# EAGLE board LED Panel v10 (EAGLE 5.03)
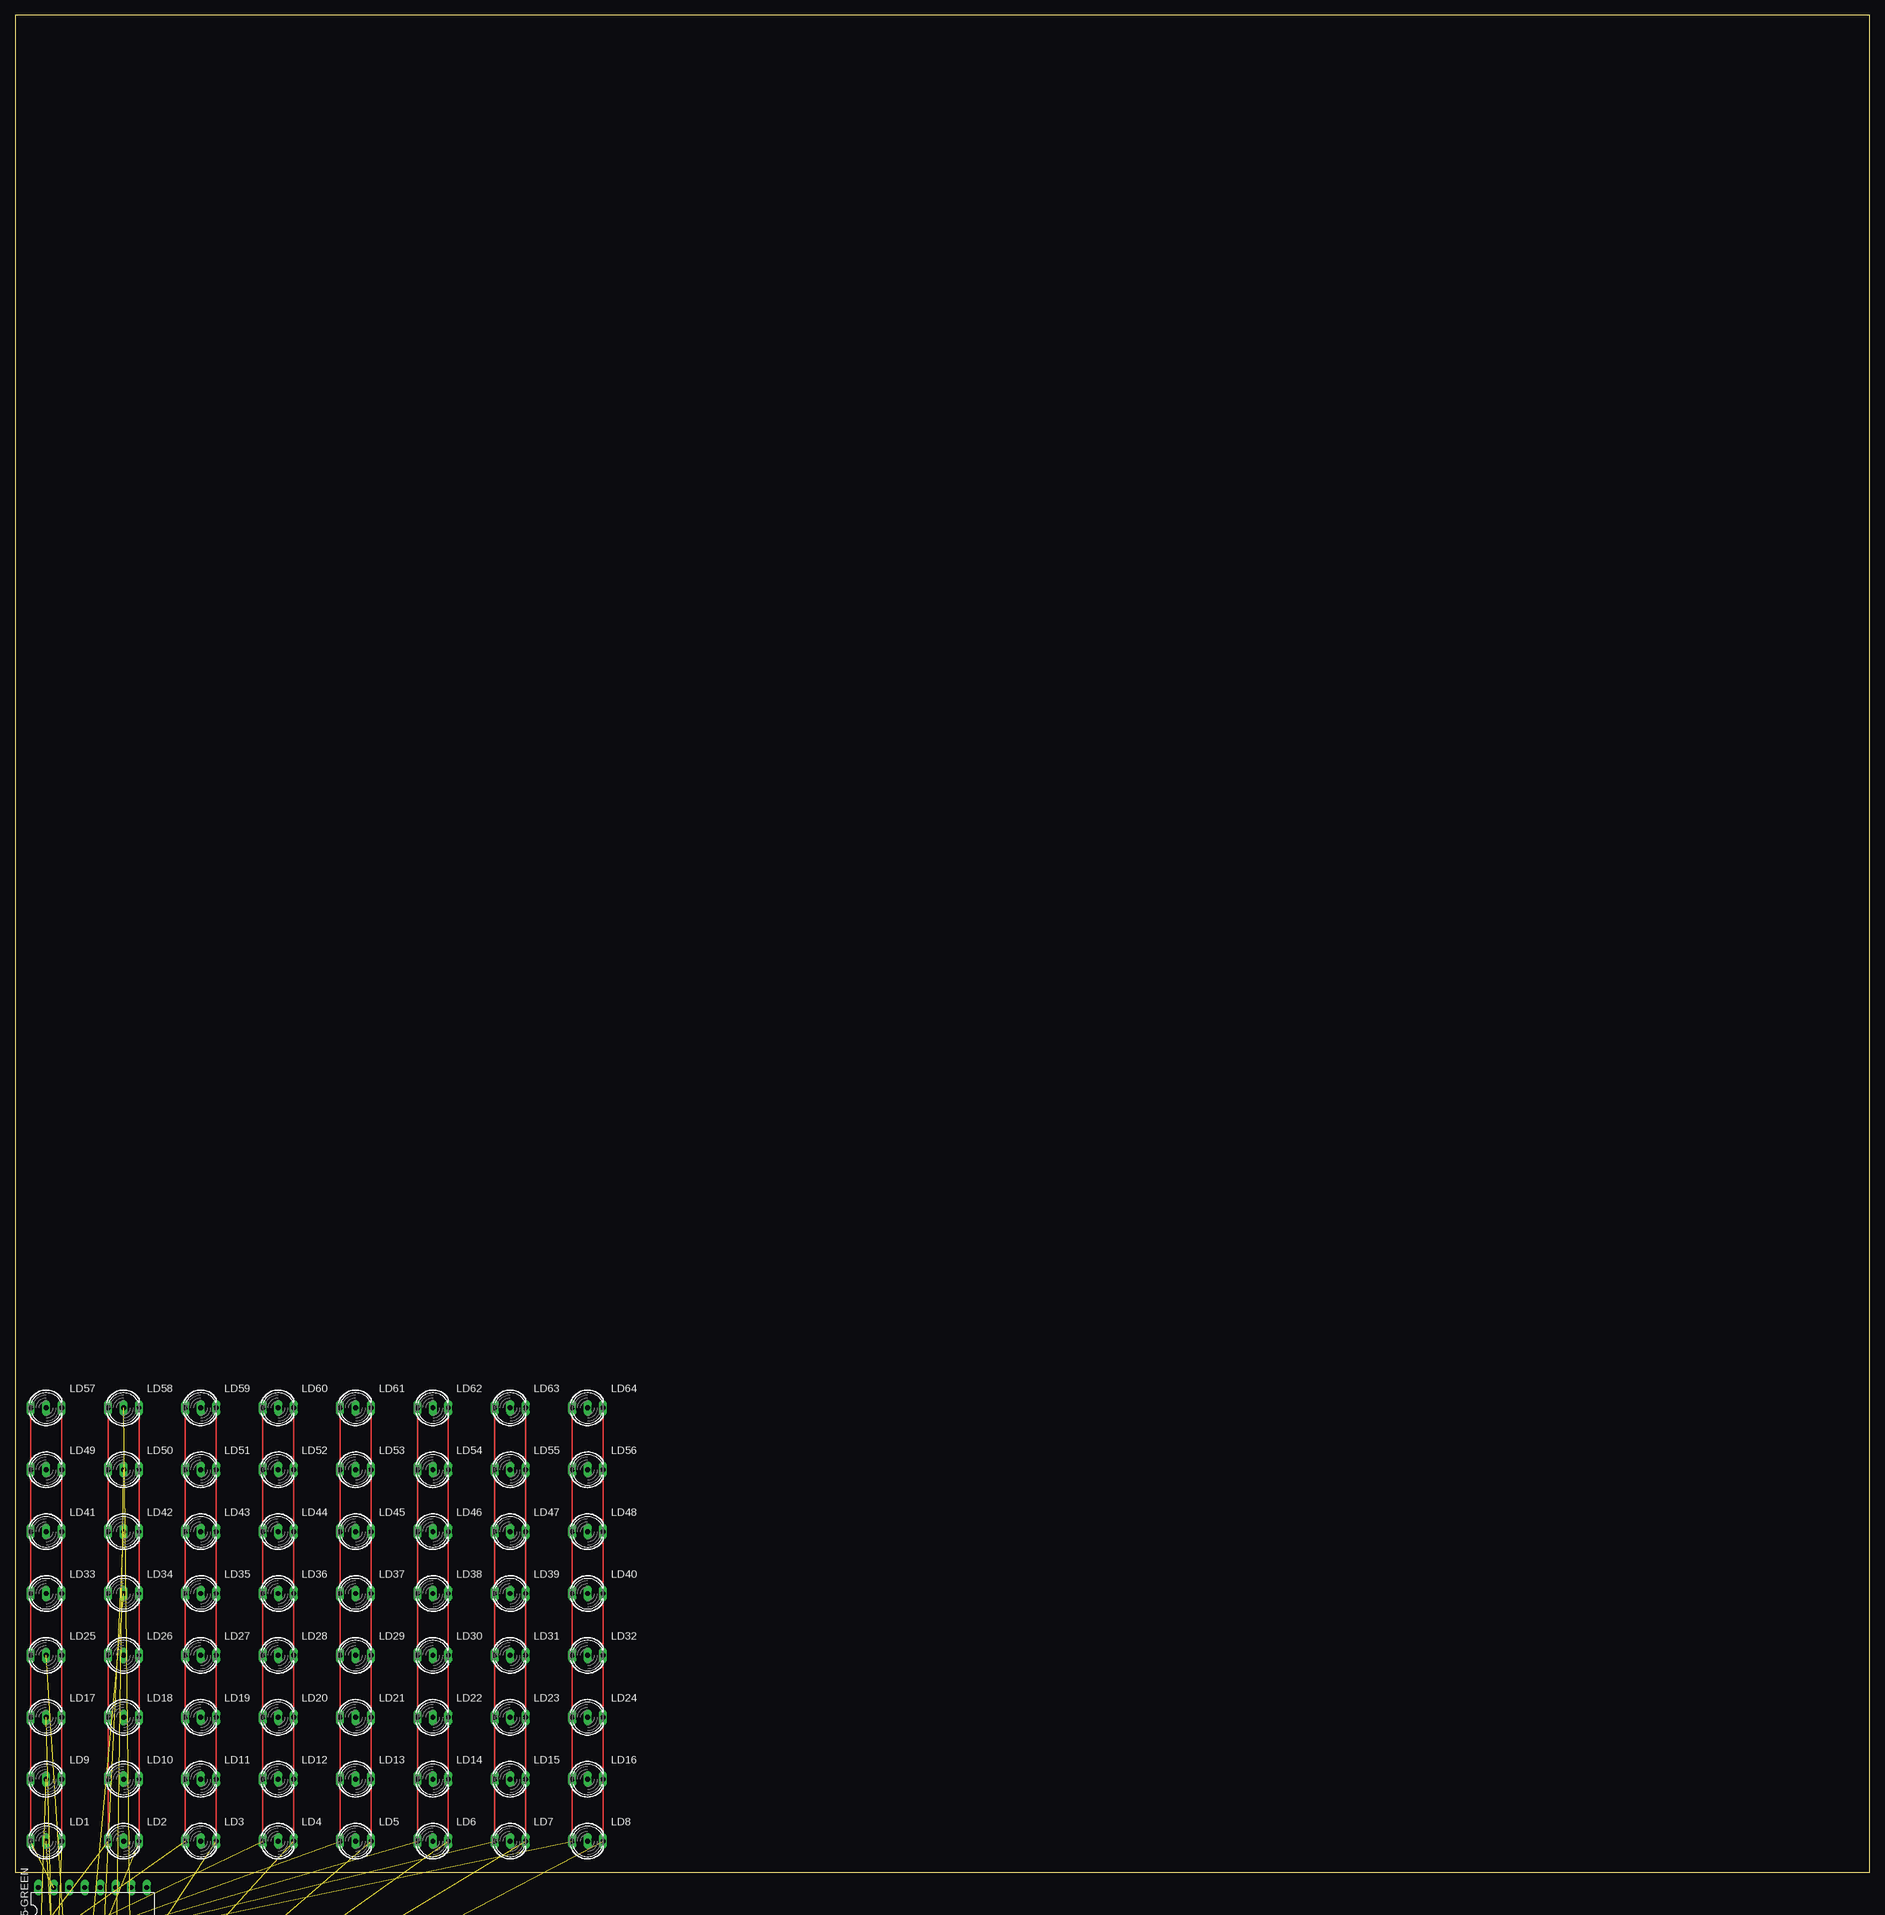
[diagram p0: board, top side]
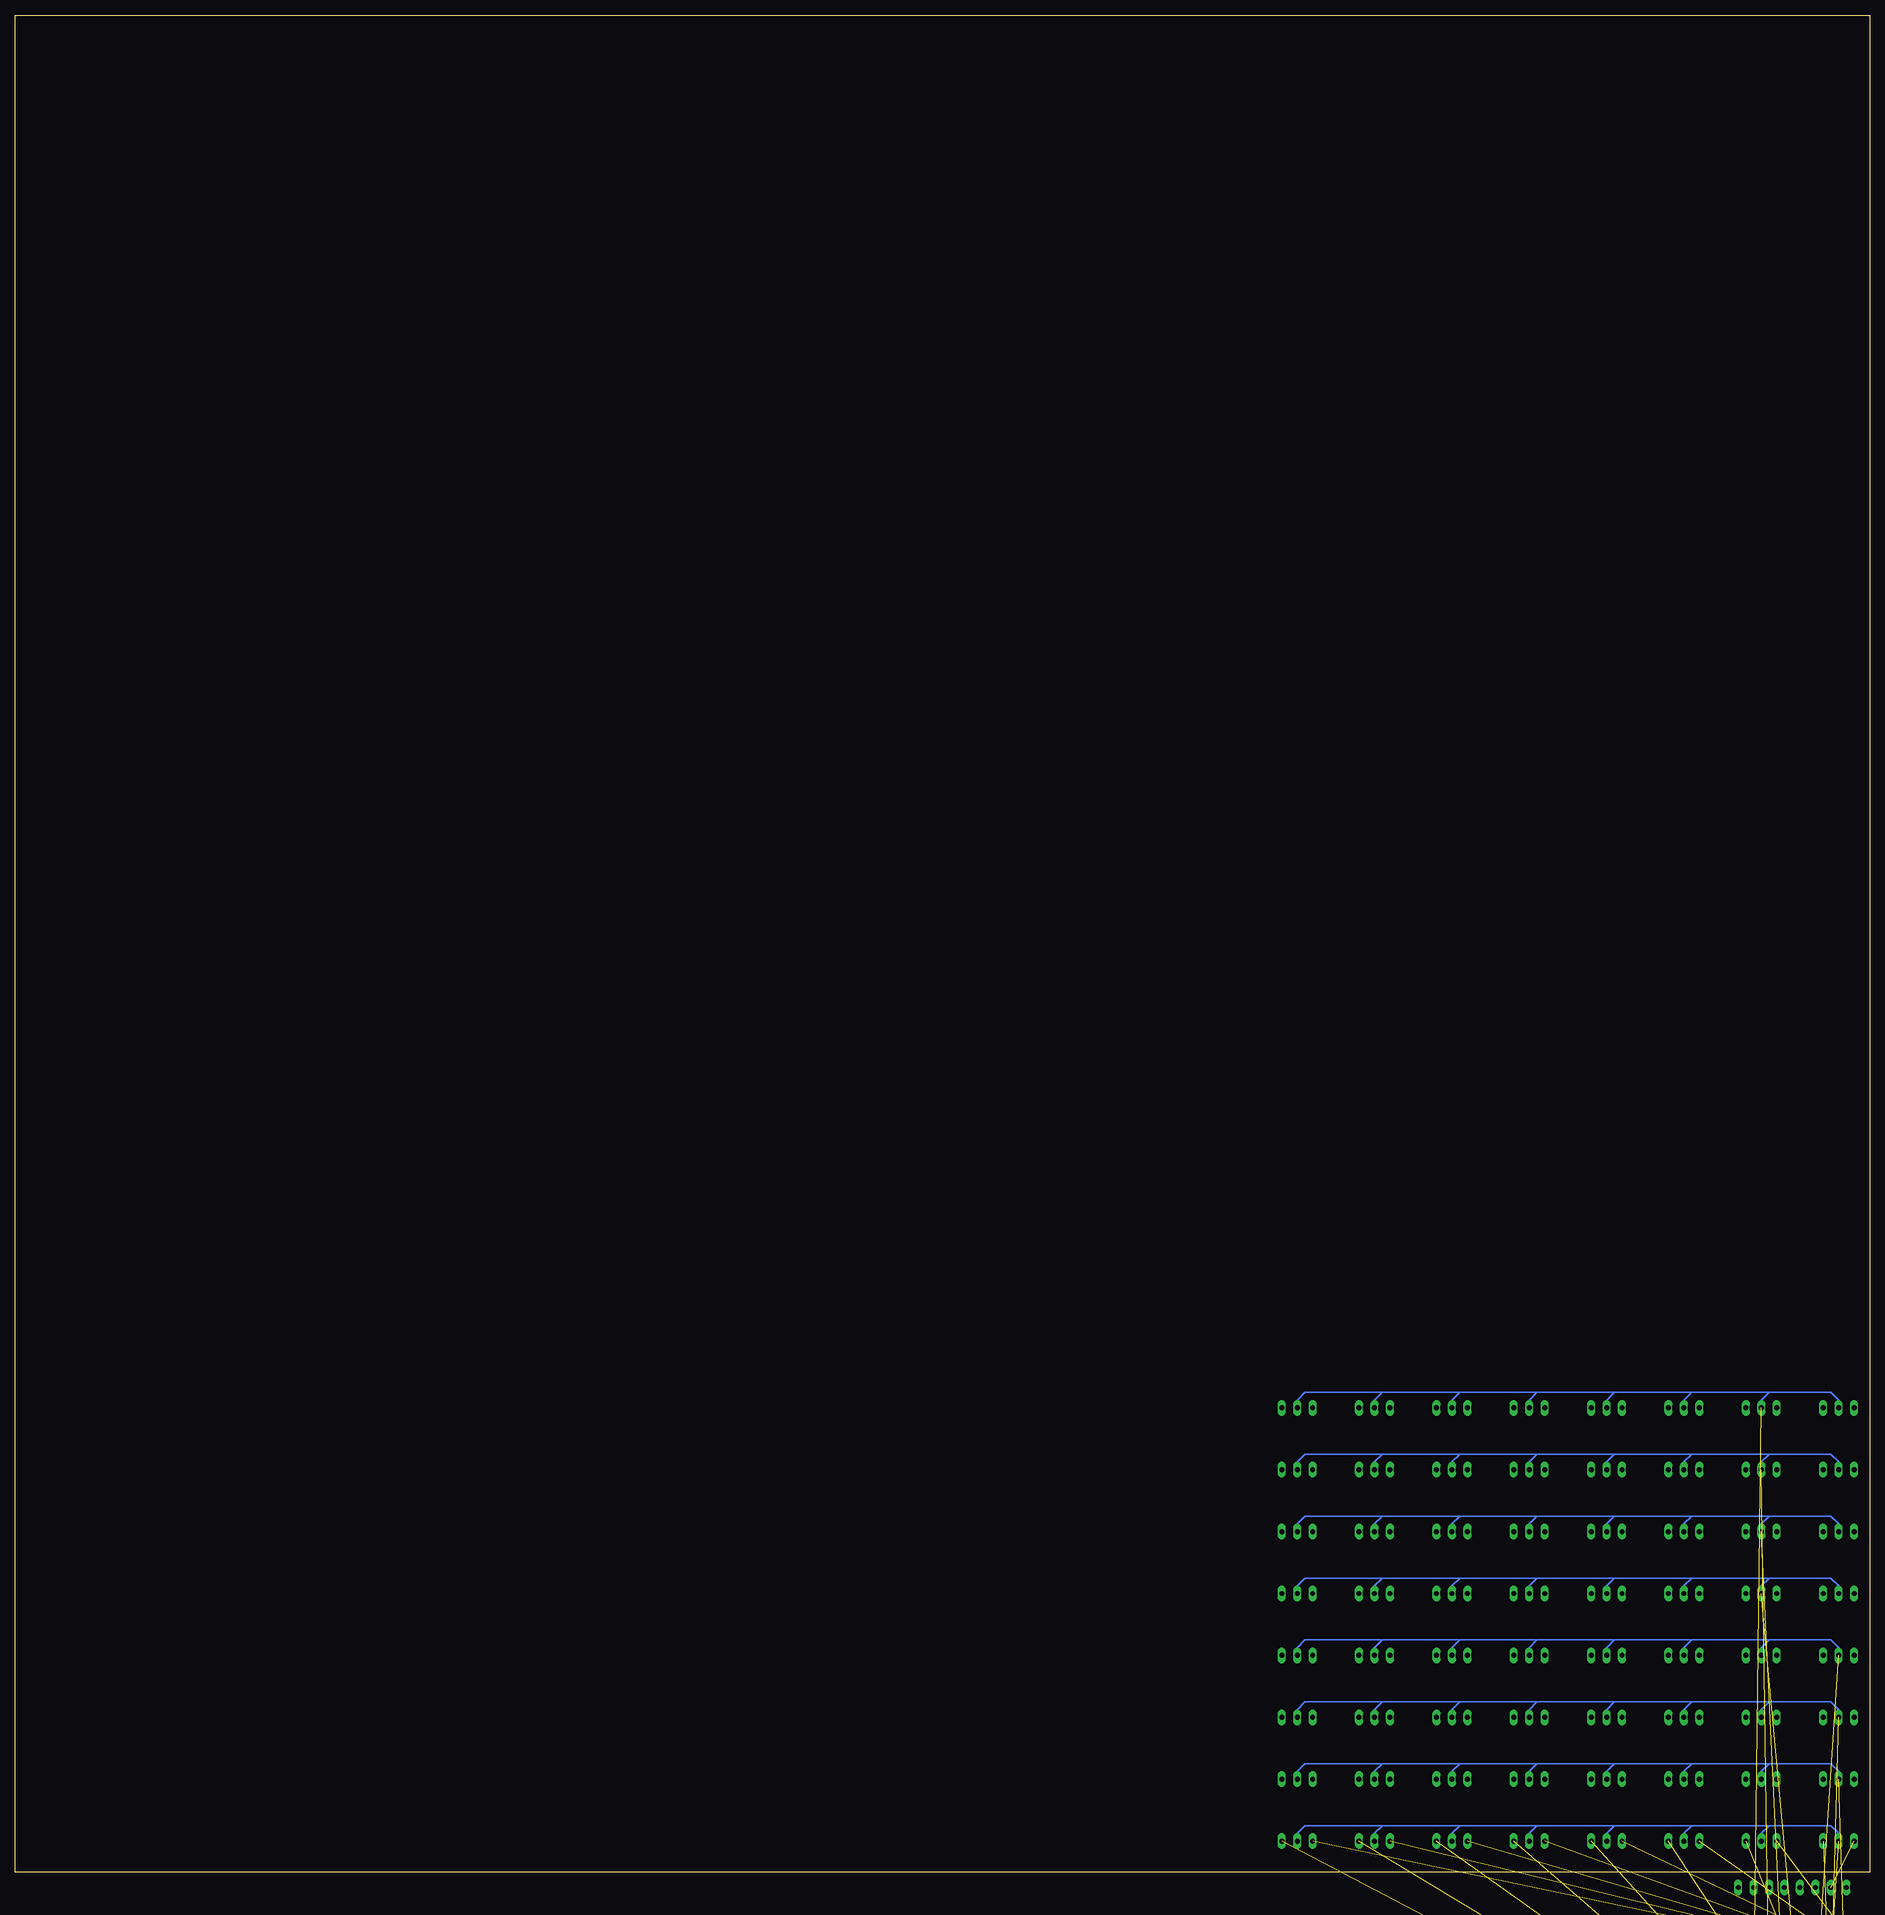
[diagram p1: board, bottom side, seen from below]

Size 304.47 x 304.79 mm. Coordinates in mm from the lower left corner, seen from the top.
Outline: 0,0 304.47,0 304.47,304.79 0,304.79 0,0
Copper layers (1*16): Top 0.035mm / dielectric 1.5mm / Bottom 0.035mm
Design rules "default": minimum track width 10mil, minimum drill 24mil, track to track 8mil, track to pad 8mil, pad to pad 8mil, via to via 8mil, smd to smd 8mil, copper to edge 40mil, drill to drill 8mil, minimum pad ring 10mil, minimum via ring 8mil, stop-mask expansion 4mil, vias tented up to drill 0mil, thermal gap 10mil

## Footprints (pad centres in the part's own frame; a part is rotated, then mirrored left to right if it is on the bottom)
DIL16 = drill 0.813 long: 1 -8.89,-3.81; 2 -6.35,-3.81; 3 -3.81,-3.81; 4 -1.27,-3.81; 5 1.27,-3.81; 6 3.81,-3.81; 7 6.35,-3.81; 8 8.89,-3.81; 9 8.89,3.81; 10 6.35,3.81; 11 3.81,3.81; 12 1.27,3.81; 13 -1.27,3.81; 14 -3.81,3.81; 15 -6.35,3.81; 16 -8.89,3.81
DUOLED-C-5MM = drill 0.813 long: AR 2.54,0; AX -2.54,0; C 0,0

## Placement (x,y rotation side)
595-CATH  [DIL16]  12.7,-19.05 0 top  (outside the outline)
595-GREEN  [DIL16]  12.7,-6.35 0 top
595-RED  [DIL16]  12.7,-31.75 0 top  (outside the outline)
LD1  [DUOLED-C-5MM]  5.08,5.08 0 top
LD2  [DUOLED-C-5MM]  17.78,5.08 0 top
LD3  [DUOLED-C-5MM]  30.48,5.08 0 top
LD4  [DUOLED-C-5MM]  43.18,5.08 0 top
LD5  [DUOLED-C-5MM]  55.88,5.08 0 top
LD6  [DUOLED-C-5MM]  68.58,5.08 0 top
LD7  [DUOLED-C-5MM]  81.28,5.08 0 top
LD8  [DUOLED-C-5MM]  93.98,5.08 0 top
LD9  [DUOLED-C-5MM]  5.08,15.24 0 top
LD10  [DUOLED-C-5MM]  17.78,15.24 0 top
LD11  [DUOLED-C-5MM]  30.48,15.24 0 top
LD12  [DUOLED-C-5MM]  43.18,15.24 0 top
LD13  [DUOLED-C-5MM]  55.88,15.24 0 top
LD14  [DUOLED-C-5MM]  68.58,15.24 0 top
LD15  [DUOLED-C-5MM]  81.28,15.24 0 top
LD16  [DUOLED-C-5MM]  93.98,15.24 0 top
LD17  [DUOLED-C-5MM]  5.08,25.4 0 top
LD18  [DUOLED-C-5MM]  17.78,25.4 0 top
LD19  [DUOLED-C-5MM]  30.48,25.4 0 top
LD20  [DUOLED-C-5MM]  43.18,25.4 0 top
LD21  [DUOLED-C-5MM]  55.88,25.4 0 top
LD22  [DUOLED-C-5MM]  68.58,25.4 0 top
LD23  [DUOLED-C-5MM]  81.28,25.4 0 top
LD24  [DUOLED-C-5MM]  93.98,25.4 0 top
LD25  [DUOLED-C-5MM]  5.08,35.56 0 top
LD26  [DUOLED-C-5MM]  17.78,35.56 0 top
LD27  [DUOLED-C-5MM]  30.48,35.56 0 top
LD28  [DUOLED-C-5MM]  43.18,35.56 0 top
LD29  [DUOLED-C-5MM]  55.88,35.56 0 top
LD30  [DUOLED-C-5MM]  68.58,35.56 0 top
LD31  [DUOLED-C-5MM]  81.28,35.56 0 top
LD32  [DUOLED-C-5MM]  93.98,35.56 0 top
LD33  [DUOLED-C-5MM]  5.08,45.72 0 top
LD34  [DUOLED-C-5MM]  17.78,45.72 0 top
LD35  [DUOLED-C-5MM]  30.48,45.72 0 top
LD36  [DUOLED-C-5MM]  43.18,45.72 0 top
LD37  [DUOLED-C-5MM]  55.88,45.72 0 top
LD38  [DUOLED-C-5MM]  68.58,45.72 0 top
LD39  [DUOLED-C-5MM]  81.28,45.72 0 top
LD40  [DUOLED-C-5MM]  93.98,45.72 0 top
LD41  [DUOLED-C-5MM]  5.08,55.88 0 top
LD42  [DUOLED-C-5MM]  17.78,55.88 0 top
LD43  [DUOLED-C-5MM]  30.48,55.88 0 top
LD44  [DUOLED-C-5MM]  43.18,55.88 0 top
LD45  [DUOLED-C-5MM]  55.88,55.88 0 top
LD46  [DUOLED-C-5MM]  68.58,55.88 0 top
LD47  [DUOLED-C-5MM]  81.28,55.88 0 top
LD48  [DUOLED-C-5MM]  93.98,55.88 0 top
LD49  [DUOLED-C-5MM]  5.08,66.04 0 top
LD50  [DUOLED-C-5MM]  17.78,66.04 0 top
LD51  [DUOLED-C-5MM]  30.48,66.04 0 top
LD52  [DUOLED-C-5MM]  43.18,66.04 0 top
LD53  [DUOLED-C-5MM]  55.88,66.04 0 top
LD54  [DUOLED-C-5MM]  68.58,66.04 0 top
LD55  [DUOLED-C-5MM]  81.28,66.04 0 top
LD56  [DUOLED-C-5MM]  93.98,66.04 0 top
LD57  [DUOLED-C-5MM]  5.08,76.2 0 top
LD58  [DUOLED-C-5MM]  17.78,76.2 0 top
LD59  [DUOLED-C-5MM]  30.48,76.2 0 top
LD60  [DUOLED-C-5MM]  43.18,76.2 0 top
LD61  [DUOLED-C-5MM]  55.88,76.2 0 top
LD62  [DUOLED-C-5MM]  68.58,76.2 0 top
LD63  [DUOLED-C-5MM]  81.28,76.2 0 top
LD64  [DUOLED-C-5MM]  93.98,76.2 0 top

## Library data of the parts
595-CATH 595-GREEN 595-RED = ic-package
LD1-LD64 = led

## Nets
CATH-0: 595-CATH.15 LD1.C LD2.C LD3.C LD4.C LD5.C LD6.C LD7.C LD8.C
CATH-1: 595-CATH.1 LD9.C LD10.C LD11.C LD12.C LD13.C LD14.C LD15.C LD16.C
CATH-2: 595-CATH.2 LD17.C LD18.C LD19.C LD20.C LD21.C LD22.C LD23.C LD24.C
CATH-3: 595-CATH.3 LD25.C LD26.C LD27.C LD28.C LD29.C LD30.C LD31.C LD32.C
CATH-4: 595-CATH.4 LD33.C LD34.C LD35.C LD36.C LD37.C LD38.C LD39.C LD40.C
CATH-5: 595-CATH.5 LD41.C LD42.C LD43.C LD44.C LD45.C LD46.C LD47.C LD48.C
CATH-6: 595-CATH.6 LD49.C LD50.C LD51.C LD52.C LD53.C LD54.C LD55.C LD56.C
CATH-7\: 595-CATH.7 LD57.C LD58.C LD59.C LD60.C LD61.C LD62.C LD63.C LD64.C
GREEN-0: 595-GREEN.15 LD1.AX LD9.AX LD17.AX LD25.AX LD33.AX LD41.AX LD49.AX LD57.AX
GREEN-1: 595-GREEN.1 LD2.AX LD10.AX LD18.AX LD26.AX LD34.AX LD42.AX LD50.AX LD58.AX
GREEN-2: 595-GREEN.2 LD3.AX LD11.AX LD19.AX LD27.AX LD35.AX LD43.AX LD51.AX LD59.AX
GREEN-3: 595-GREEN.3 LD4.AX LD12.AX LD20.AX LD28.AX LD36.AX LD44.AX LD52.AX LD60.AX
GREEN-4: 595-GREEN.4 LD5.AX LD13.AX LD21.AX LD29.AX LD37.AX LD45.AX LD53.AX LD61.AX
GREEN-5: 595-GREEN.5 LD6.AX LD14.AX LD22.AX LD30.AX LD38.AX LD46.AX LD54.AX LD62.AX
GREEN-6: 595-GREEN.6 LD7.AX LD15.AX LD23.AX LD31.AX LD39.AX LD47.AX LD55.AX LD63.AX
GREEN-7: 595-GREEN.7 LD8.AX LD16.AX LD24.AX LD32.AX LD40.AX LD48.AX LD56.AX LD64.AX
RED-0: 595-RED.15 LD1.AR LD9.AR LD17.AR LD25.AR LD33.AR LD41.AR LD49.AR LD57.AR
RED-1: 595-RED.1 LD2.AR LD10.AR LD18.AR LD26.AR LD34.AR LD42.AR LD50.AR LD58.AR
RED-2: 595-RED.2 LD3.AR LD11.AR LD19.AR LD27.AR LD35.AR LD43.AR LD51.AR LD59.AR
RED-3: 595-RED.3 LD4.AR LD12.AR LD20.AR LD28.AR LD36.AR LD44.AR LD52.AR LD60.AR
RED-4: 595-RED.4 LD5.AR LD13.AR LD21.AR LD29.AR LD37.AR LD45.AR LD53.AR LD61.AR
RED-5: 595-RED.5 LD6.AR LD14.AR LD22.AR LD30.AR LD38.AR LD46.AR LD54.AR LD62.AR
RED-6: 595-RED.6 LD7.AR LD15.AR LD23.AR LD31.AR LD39.AR LD47.AR LD55.AR LD63.AR
RED-7: 595-RED.7 LD8.AR LD16.AR LD24.AR LD32.AR LD40.AR LD48.AR LD56.AR LD64.AR

## Tracks (layer width: path | path; a pad name or v marks a point on that pad's centre or on a via)
CATH-0  (1 unrouted)
  Bottom 0.254: 16.51,7.62 6.35,7.62 5.08,6.35 LD1.C | 16.51,7.62 17.78,6.35 LD2.C | 29.21,7.62 30.48,6.35 LD3.C | 16.51,7.62 29.21,7.62 | 41.91,7.62 43.18,6.35 LD4.C | 29.21,7.62 41.91,7.62 | 54.61,7.62 55.88,6.35 LD5.C | 41.91,7.62 54.61,7.62 | 67.31,7.62 68.58,6.35 LD6.C | 54.61,7.62 67.31,7.62 | 80.01,7.62 81.28,6.35 LD7.C | 67.31,7.62 80.01,7.62 | 80.01,7.62 92.71,7.62 93.98,6.35 LD8.C
CATH-1  (1 unrouted)
  Bottom 0.254: 16.51,17.78 6.35,17.78 5.08,16.51 LD9.C | 16.51,17.78 17.78,16.51 LD10.C | 29.21,17.78 30.48,16.51 LD11.C | 16.51,17.78 29.21,17.78 | 41.91,17.78 43.18,16.51 LD12.C | 29.21,17.78 41.91,17.78 | 54.61,17.78 55.88,16.51 LD13.C | 41.91,17.78 54.61,17.78 | 67.31,17.78 68.58,16.51 LD14.C | 54.61,17.78 67.31,17.78 | 80.01,17.78 81.28,16.51 LD15.C | 67.31,17.78 80.01,17.78 | 80.01,17.78 92.71,17.78 93.98,16.51 LD16.C
CATH-2  (1 unrouted)
  Bottom 0.254: 16.51,27.94 6.35,27.94 5.08,26.67 LD17.C | 16.51,27.94 17.78,26.67 LD18.C | 29.21,27.94 30.48,26.67 LD19.C | 16.51,27.94 29.21,27.94 | 41.91,27.94 43.18,26.67 LD20.C | 29.21,27.94 41.91,27.94 | 54.61,27.94 55.88,26.67 LD21.C | 41.91,27.94 54.61,27.94 | 67.31,27.94 68.58,26.67 LD22.C | 54.61,27.94 67.31,27.94 | 80.01,27.94 81.28,26.67 LD23.C | 67.31,27.94 80.01,27.94 | 80.01,27.94 92.71,27.94 93.98,26.67 LD24.C
CATH-3  (1 unrouted)
  Bottom 0.254: 16.51,38.1 6.35,38.1 5.08,36.83 LD25.C | 16.51,38.1 17.78,36.83 LD26.C | 29.21,38.1 30.48,36.83 LD27.C | 16.51,38.1 29.21,38.1 | 41.91,38.1 43.18,36.83 LD28.C | 29.21,38.1 41.91,38.1 | 54.61,38.1 55.88,36.83 LD29.C | 41.91,38.1 54.61,38.1 | 67.31,38.1 68.58,36.83 LD30.C | 54.61,38.1 67.31,38.1 | 80.01,38.1 81.28,36.83 LD31.C | 67.31,38.1 80.01,38.1 | 80.01,38.1 92.71,38.1 93.98,36.83 LD32.C
CATH-4  (1 unrouted)
  Bottom 0.254: 16.51,48.26 6.35,48.26 5.08,46.99 LD33.C | 16.51,48.26 17.78,46.99 LD34.C | 29.21,48.26 30.48,46.99 LD35.C | 16.51,48.26 29.21,48.26 | 41.91,48.26 43.18,46.99 LD36.C | 29.21,48.26 41.91,48.26 | 54.61,48.26 55.88,46.99 LD37.C | 41.91,48.26 54.61,48.26 | 67.31,48.26 68.58,46.99 LD38.C | 54.61,48.26 67.31,48.26 | 80.01,48.26 81.28,46.99 LD39.C | 67.31,48.26 80.01,48.26 | 80.01,48.26 92.71,48.26 93.98,46.99 LD40.C
CATH-5  (1 unrouted)
  Bottom 0.254: 16.51,58.42 6.35,58.42 5.08,57.15 LD41.C | 16.51,58.42 17.78,57.15 LD42.C | 29.21,58.42 30.48,57.15 LD43.C | 16.51,58.42 29.21,58.42 | 41.91,58.42 43.18,57.15 LD44.C | 29.21,58.42 41.91,58.42 | 54.61,58.42 55.88,57.15 LD45.C | 41.91,58.42 54.61,58.42 | 67.31,58.42 68.58,57.15 LD46.C | 54.61,58.42 67.31,58.42 | 80.01,58.42 81.28,57.15 LD47.C | 67.31,58.42 80.01,58.42 | 80.01,58.42 92.71,58.42 93.98,57.15 LD48.C
CATH-6  (1 unrouted)
  Bottom 0.254: 16.51,68.58 6.35,68.58 5.08,67.31 LD49.C | 16.51,68.58 17.78,67.31 LD50.C | 29.21,68.58 30.48,67.31 LD51.C | 16.51,68.58 29.21,68.58 | 41.91,68.58 43.18,67.31 LD52.C | 29.21,68.58 41.91,68.58 | 54.61,68.58 55.88,67.31 LD53.C | 41.91,68.58 54.61,68.58 | 67.31,68.58 68.58,67.31 LD54.C | 54.61,68.58 67.31,68.58 | 80.01,68.58 81.28,67.31 LD55.C | 67.31,68.58 80.01,68.58 | 80.01,68.58 92.71,68.58 93.98,67.31 LD56.C
CATH-7\  (1 unrouted)
  Bottom 0.254: 16.51,78.74 6.35,78.74 5.08,77.47 LD57.C | 16.51,78.74 17.78,77.47 LD58.C | 29.21,78.74 30.48,77.47 LD59.C | 16.51,78.74 29.21,78.74 | 41.91,78.74 43.18,77.47 LD60.C | 29.21,78.74 41.91,78.74 | 54.61,78.74 55.88,77.47 LD61.C | 41.91,78.74 54.61,78.74 | 67.31,78.74 68.58,77.47 LD62.C | 54.61,78.74 67.31,78.74 | 80.01,78.74 81.28,77.47 LD63.C | 67.31,78.74 80.01,78.74 | 80.01,78.74 92.71,78.74 93.98,77.47 LD64.C
GREEN-0  (1 unrouted)
  Top 0.254: LD57.AX LD49.AX LD41.AX LD33.AX LD25.AX LD17.AX LD9.AX LD1.AX
GREEN-1  (1 unrouted)
  Top 0.254: LD58.AX LD50.AX LD42.AX LD34.AX LD26.AX LD18.AX LD10.AX LD2.AX
GREEN-2  (1 unrouted)
  Top 0.254: LD59.AX LD51.AX LD43.AX LD35.AX LD27.AX LD19.AX LD11.AX LD3.AX
GREEN-3  (1 unrouted)
  Top 0.254: LD60.AX LD52.AX LD44.AX LD36.AX LD28.AX LD20.AX LD12.AX LD4.AX
GREEN-4  (1 unrouted)
  Top 0.254: LD61.AX LD53.AX LD45.AX LD37.AX LD29.AX LD21.AX LD13.AX LD5.AX
GREEN-5  (1 unrouted)
  Top 0.254: LD62.AX LD54.AX LD46.AX LD38.AX LD30.AX LD22.AX LD14.AX LD6.AX
GREEN-6  (1 unrouted)
  Top 0.254: LD63.AX LD55.AX LD47.AX LD39.AX LD31.AX LD23.AX LD15.AX LD7.AX
GREEN-7  (1 unrouted)
  Top 0.254: LD64.AX LD56.AX LD48.AX LD40.AX LD32.AX LD24.AX LD16.AX LD8.AX
RED-0  (1 unrouted)
  Top 0.254: LD57.AR LD49.AR LD41.AR LD33.AR LD25.AR LD17.AR LD9.AR LD1.AR
RED-1  (1 unrouted)
  Top 0.254: LD58.AR LD50.AR LD42.AR LD34.AR LD26.AR LD18.AR LD10.AR LD2.AR
RED-2  (1 unrouted)
  Top 0.254: LD59.AR LD51.AR LD43.AR LD35.AR LD27.AR LD19.AR LD11.AR LD3.AR
RED-3  (1 unrouted)
  Top 0.254: LD60.AR LD52.AR LD44.AR LD36.AR LD28.AR LD20.AR LD12.AR LD4.AR
RED-4  (1 unrouted)
  Top 0.254: LD61.AR LD53.AR LD45.AR LD37.AR LD29.AR LD21.AR LD13.AR LD5.AR
RED-5  (1 unrouted)
  Top 0.254: LD62.AR LD54.AR LD46.AR LD38.AR LD30.AR LD22.AR LD14.AR LD6.AR
RED-6  (1 unrouted)
  Top 0.254: LD63.AR LD55.AR LD47.AR LD39.AR LD31.AR LD23.AR LD15.AR LD7.AR
RED-7  (1 unrouted)
  Top 0.254: LD64.AR LD56.AR LD48.AR LD40.AR LD32.AR LD24.AR LD16.AR LD8.AR